# EAGLE board Genus_MainBoard_Lite-v.1.0 (EAGLE 9.4.2)
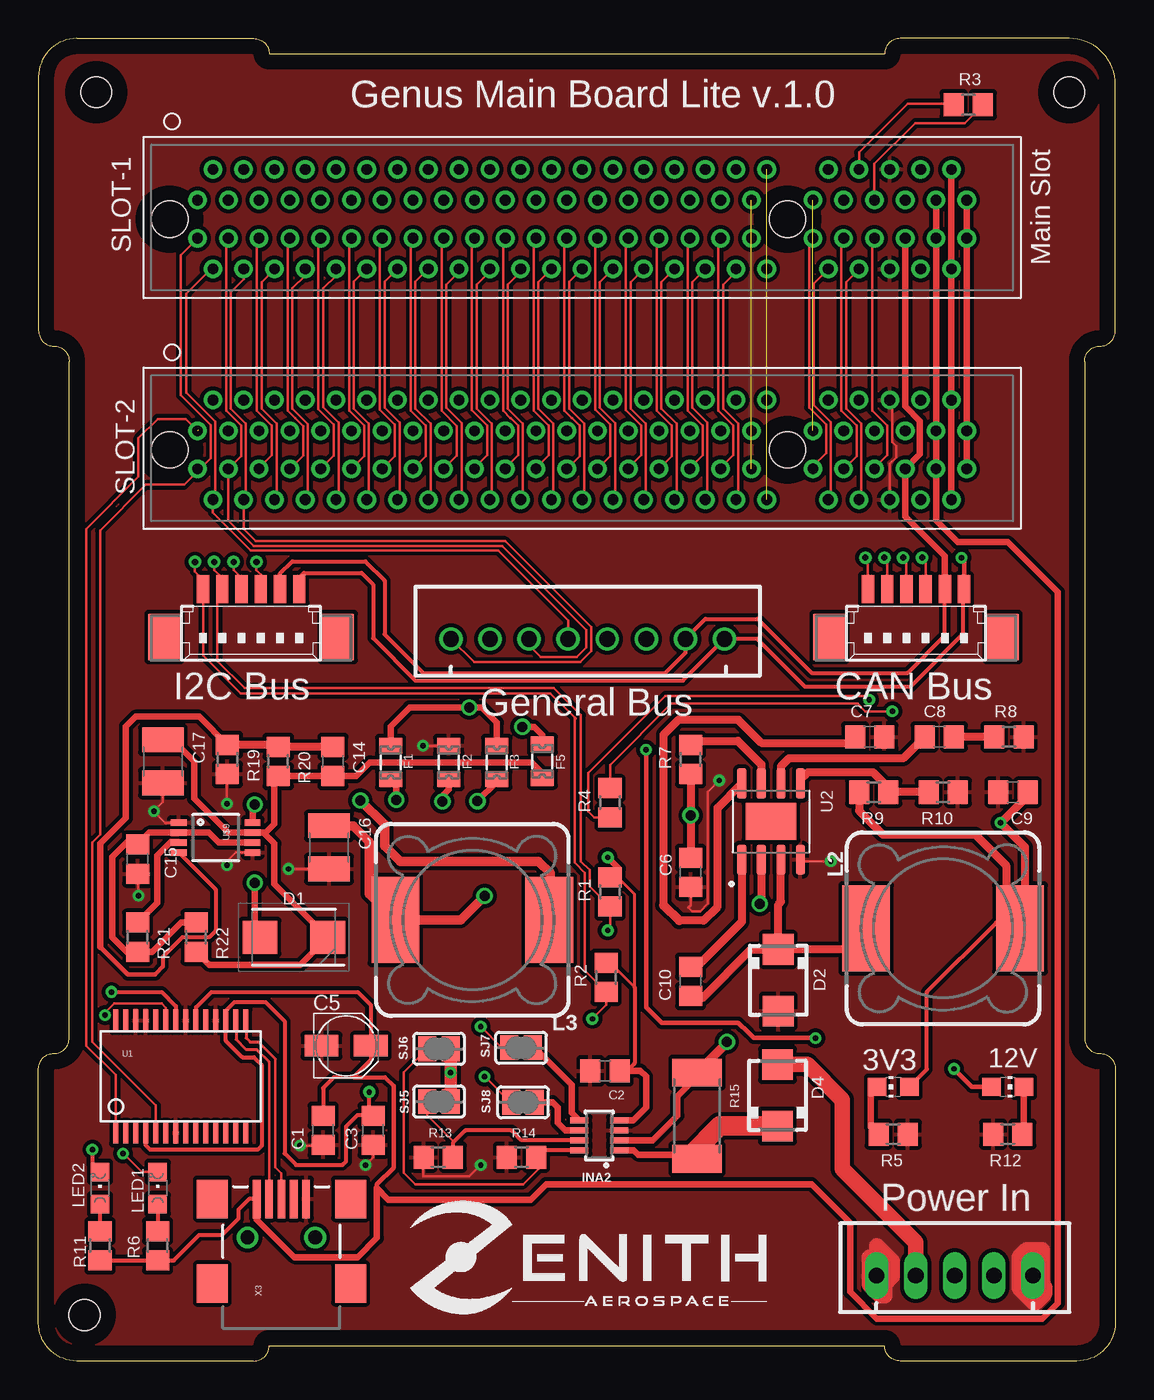
[diagram p0: board, top side]
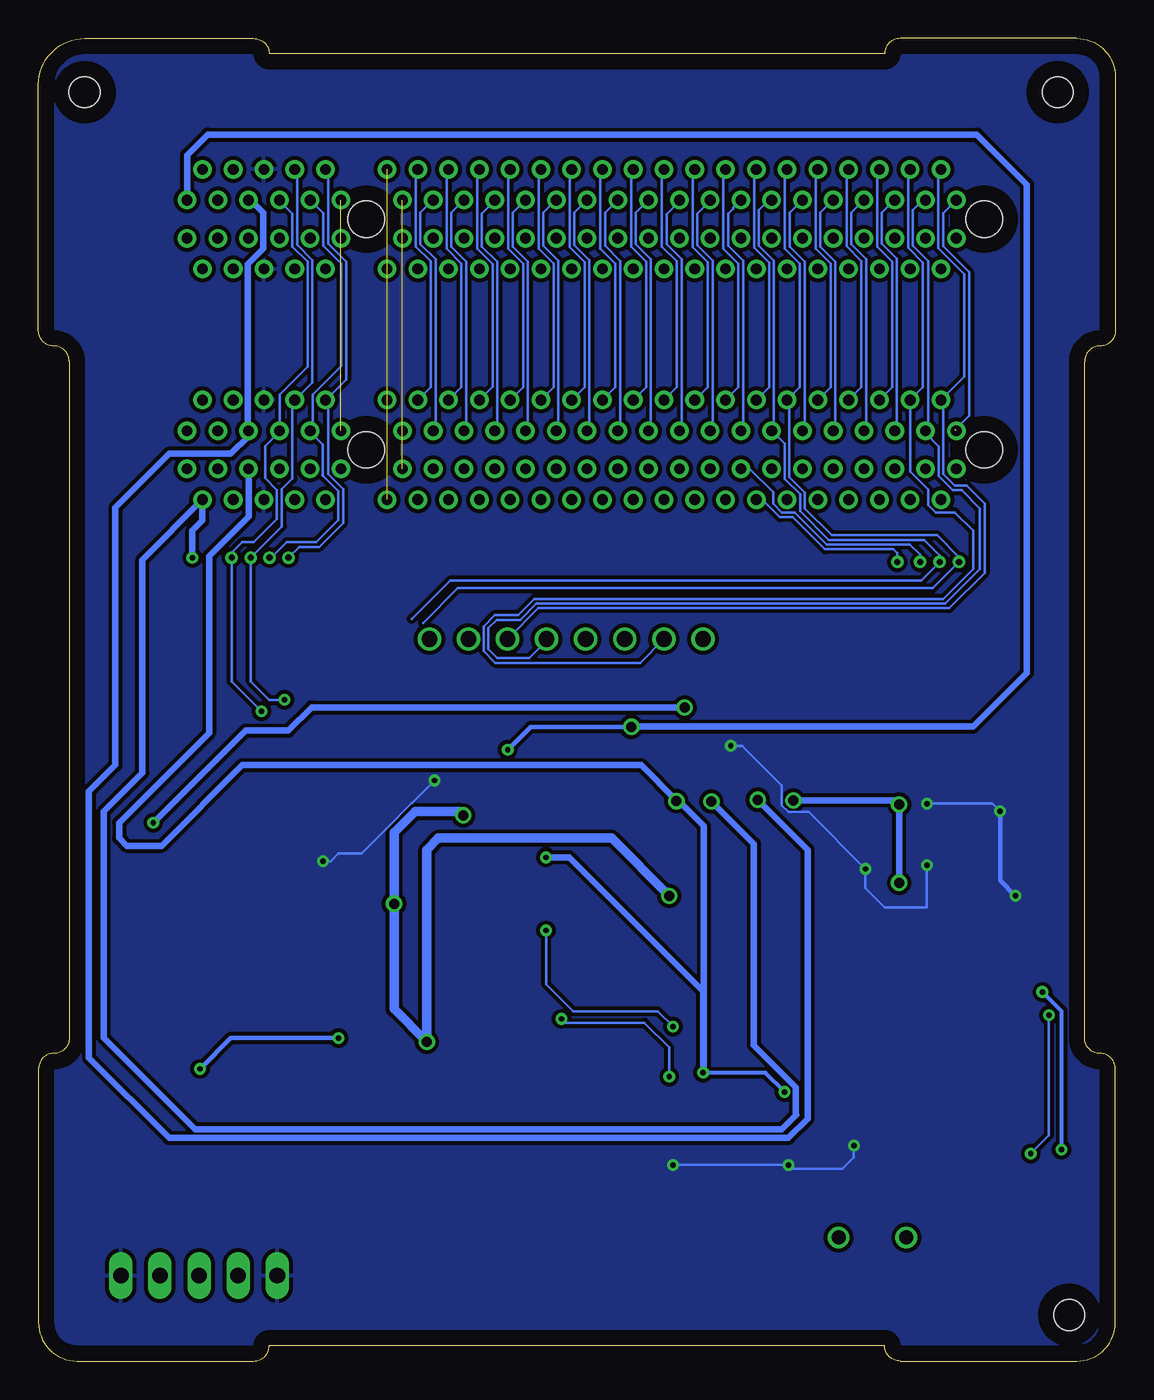
[diagram p1: board, bottom side, seen from below]

Size 70 x 86 mm. Coordinates in mm from the lower left corner, seen from the top.
Outline: 14,0 2.5,0 arc-90 0,2.5 0,19 arc-90 1,20 arc90 2,21 2,65 arc90 1,66 arc-90 0,67 0,83.5 arc-90 2.5,86 14,86 arc-90 15,85 55,85 arc-90 56,86 67,86 arc-90 70,83 70,67 arc-90 69,66 arc90 68,65 68,21 arc90 69,20 arc-90 70,19 70,2.5 arc-90 67.5,0 56,0 arc-90 55,1 15,1 arc-90 14,0
Copper layers (1*16): Top 0.035mm / dielectric 1.5mm / Bottom 0.035mm
Design rules "default": minimum track width 6mil, minimum drill 0.35mm, track to track 6mil, track to pad 6mil, pad to pad 6mil, via to via 6mil, smd to smd 6mil, copper to edge 40mil, drill to drill 6mil, minimum pad ring 10mil, minimum via ring 8mil, stop-mask expansion 4mil, vias tented up to drill 0mil, thermal gap 10mil
Net classes: 1 power: width 0.254 mm
Holes 2 mm at 3.75,82.5 67,82.5 3,3

## Footprints (pad centres in the part's own frame; a part is rotated, then mirrored left to right if it is on the bottom)
CHIP-LED0805 = smd 1.2 x 1.2: A 0,-1.05; C 0,1.05
C0805 = smd 1.3 x 1.5: 1 -0.95,0; 2 0.95,0
PANASONIC_B = smd 2.2 x 1.4: + 1.6,0; - -1.6,0
C1210 = smd 1.6 x 2.7: 1 -1.4,0; 2 1.4,0
DIOM5436X247N = smd 2.25 x 2.15: 1 -2.2,0; 2 2.2,0
SMA = smd 2 x 2: A 2,0; C -2,0
0805L = smd 1 x 1.5: 1 -1.1,0; 2 1.1,0
SOT23-8 = smd 0.4 x 1.2: 1 -0.975,-1.3; 2 -0.325,-1.3; 3 0.325,-1.3; 4 0.975,-1.3; 5 0.975,1.3; 6 0.325,1.3; 7 -0.325,1.3; 8 -0.975,1.3
SRR1280 = smd 5.6 x 3.1: 1 0.635,5; 2 0.635,-5
CHIPLED_0805 = smd 1.2 x 1.2: A 0,-1.05; C 0,1.05
R0805 = smd 1.3 x 1.5: 1 -0.95,0; 2 0.95,0
R2512 = smd 1.8 x 3.2: 1 -2.8,0; 2 2.8,0
SOLDERJUMPER_REFLOW_NOPASTE = smd 1.168 x 1.6: 1 -0.762,0; 2 0.762,0
PCIE-098-02-X-D-TH = drill 0.7 pad 1.1: A1 25,-1.24; A2 24,-3.24; A3 23,-1.24; A4 22,-3.24; A5 21,-1.24; A6 20,-3.24; A7 19,-1.24; A8 18,-3.24; A9 17,-1.24; A10 16,-3.24; A11 15,-1.24; A12 12,-3.24; A13 11,-1.24; A14 10,-3.24; A15 9,-1.24; A16 8,-3.24; A17 7,-1.24; A18 6,-3.24; A19 5,-1.24; A20 4,-3.24; A21 3,-1.24; A22 2,-3.24; A23 1,-1.24; A24 0,-3.24; A25 -1,-1.24; A26 -2,-3.24; A27 -3,-1.24; A28 -4,-3.24; A29 -5,-1.24; A30 -6,-3.24; A31 -7,-1.24; A32 -8,-3.24; A33 -9,-1.24; A34 -10,-3.24; A35 -11,-1.24; A36 -12,-3.24; A37 -13,-1.24; A38 -14,-3.24; A39 -15,-1.24; A40 -16,-3.24; A41 -17,-1.24; A42 -18,-3.24; A43 -19,-1.24; A44 -20,-3.24; A45 -21,-1.24; A46 -22,-3.24; A47 -23,-1.24; A48 -24,-3.24; A49 -25,-1.24; B1 25,1.24; B2 24,3.24; B3 23,1.24; B4 22,3.24; B5 21,1.24; B6 20,3.24; B7 19,1.24; B8 18,3.24; B9 17,1.24; B10 16,3.24; B11 15,1.24; B12 12,3.24; B13 11,1.24; B14 10,3.24; B15 9,1.24; B16 8,3.24; B17 7,1.24; B18 6,3.24; B19 5,1.24; B20 4,3.24; B21 3,1.24; B22 2,3.24; B23 1,1.24; B24 0,3.24; B25 -1,1.24; B26 -2,3.24; B27 -3,1.24; B28 -4,3.24; B29 -5,1.24; B30 -6,3.24; B31 -7,1.24; B32 -8,3.24; B33 -9,1.24; B34 -10,3.24; B35 -11,1.24; B36 -12,3.24; B37 -13,1.24; B38 -14,3.24; B39 -15,1.24; B40 -16,3.24; B41 -17,1.24; B42 -18,3.24; B43 -19,1.24; B44 -20,3.24; B45 -21,1.24; B46 -22,3.24; B47 -23,1.24; B48 -24,3.24; B49 -25,1.24 | hole 2.35: 13.35,0; -26.81,0
SSOP28DB = smd 0.348 x 1.397: 1 -4.225,-3.656; 2 -3.575,-3.656; 3 -2.925,-3.656; 4 -2.275,-3.656; 5 -1.625,-3.656; 6 -0.975,-3.656; 7 -0.325,-3.656; 8 0.325,-3.656; 9 0.975,-3.656; 10 1.625,-3.656; 11 2.275,-3.656; 12 2.925,-3.656; 13 3.575,-3.656; 14 4.225,-3.656; 15 4.225,3.656; 16 3.575,3.656; 17 2.925,3.656; 18 2.275,3.656; 19 1.625,3.656; 20 0.975,3.656; 21 0.325,3.656; 22 -0.325,3.656; 23 -0.975,3.656; 24 -1.625,3.656; 25 -2.275,3.656; 26 -2.925,3.656; 27 -3.575,3.656; 28 -4.225,3.656
SOIC127P600X170-9N = smd 1.97 x 0.6: 1 -2.475,1.905; 2 -2.475,0.635; 3 -2.475,-0.635; 4 -2.475,-1.905; 5 2.475,-1.905; 6 2.475,-0.635; 7 2.475,0.635; 8 2.475,1.905 | smd 2.41 x 3.3: 9 0,0
MSOP-8 = smd 0.41 x 1.02: 1 -0.975,-2.4; 2 -0.325,-2.4; 3 0.325,-2.4; 4 0.975,-2.4; 5 0.975,2.4; 6 0.325,2.4; 7 -0.325,2.4; 8 -0.975,2.4
53398-06 = smd 0.8 x 1.8: 1 3.125,-2.5; 2 1.875,-2.5; 3 0.625,-2.5; 4 -0.625,-2.5; 5 -1.875,-2.5; 6 -3.125,-2.5 | smd 2.1 x 3: S1 5.625,0.625; S2 -5.625,0.625
JST-XH-08-PACKAGE-ROUND-PAD = drill 1.016: 1 -8.89,0; 2 -6.35,0; 3 -3.81,0; 4 -1.27,0; 5 1.27,0; 6 3.81,0; 7 6.35,0; 8 8.89,0
USB-MINIB-NOSTOP = smd 2.5 x 0.5: D+ 2.5,0; D- 2.5,0.8; GND 2.5,-1.6; ID 2.5,-0.8; VBUS 2.5,1.6 | smd 2.5 x 2: G1 -3,-4.5; G2 -3,4.5; G3 2.5,4.5; G4 2.5,-4.5 | drill 0.9 pad 0.8: H1 0,2.2 | drill 0.9 pad 0.787: H2 0,-2.2
JST-XH-05-PACKAGE-LONG-PAD = drill 1.016 long: 1 -5.08,0; 2 -2.54,0; 3 0,0; 4 2.54,0; 5 5.08,0

## Placement (x,y rotation side)
3V3  [CHIP-LED0805]  55.56,17.83 90 top
12V  [CHIP-LED0805]  63,17.83 270 top
C1  0.1uF  [C0805]  18.5,15 270 top
C2  [C0805]  36.83,18.87 180 top
C3  0.1uF  [C0805]  21.75,15 270 top
C5  10uF  [PANASONIC_B]  20,20.5 0 top
C6  10uF  [C0805]  42.39,31.78 270 top
C7  0.1uF  [C0805]  54.03,40.59 0 top
C8  3.9nF  [C0805]  58.55,40.59 0 top
C9  22uF  [C0805]  63.34,36.99 180 top
C10  10nF  [C0805]  42.39,24.69 90 top
C14  39pF  [C0805]  19.14,38.99 270 top
C15  100nF  [C0805]  6.44,32.64 90 top
C16  22uF  [C1210]  18.89,33.4 270 top
C17  68uF  [C1210]  8.09,38.99 270 top
D1  MBRS140T3G  [DIOM5436X247N]  16.6,27.56 180 top
D2  B130-13-F  [SMA]  48.09,24.76 270 top
D4  S1M  [SMA]  48.04,17.28 90 top
F1  0805L075  [0805L]  22.89,38.92 90 top
F2  0805L075  [0805L]  26.67,38.92 90 top
F3  0805L075  [0805L]  29.79,38.92 90 top
F5  0805L075  [0805L]  32.75,39 270 top
INA2  INA219BIDCNT  [SOT23-8]  36.45,14.68 90 top
L2  10uH  [SRR1280]  58.8,27.5 90 top
L3  6.8uH  [SRR1280]  28.2,28.05 90 top
LED1  Red  [CHIPLED_0805]  7.75,11.25 0 top
LED2  Green  [CHIPLED_0805]  4,11.25 0 top
R1  4,7k  [R0805]  37.15,30.5 90 top
R2  4,7k  [R0805]  36.9,24.95 90 top
R3  120  [R0805]  60.44,81.69 0 top
R4  120  [R0805]  37.15,36.31 90 top
R5  220  [R0805]  55.56,14.74 180 top
R6  1K  [R0805]  7.75,7.5 270 top
R7  100K  [R0805]  42.39,39.12 270 top
R8  6.8K  [R0805]  63.08,40.59 180 top
R9  26.1K  [R0805]  54.3,36.99 180 top
R10  10K  [R0805]  58.8,36.99 180 top
R11  1K  [R0805]  4,7.5 270 top
R12  500  [R0805]  63,14.74 0 top
R13  10K  [R0805]  25.98,13.26 0 top
R14  10K  [R0805]  31.4,13.26 0 top
R15  0.1  [R2512]  42.8,15.95 270 top
R19  17k3  [R0805]  12.28,39.12 270 top
R20  150K  [R0805]  15.58,38.99 270 top
R21  200K  [R0805]  6.44,27.56 270 top
R22  200K  [R0805]  10.25,27.56 270 top
SJ5  [SOLDERJUMPER_REFLOW_NOPASTE]  26.03,16.87 180 top
SJ6  [SOLDERJUMPER_REFLOW_NOPASTE]  26.03,20.3 180 top
SJ7  [SOLDERJUMPER_REFLOW_NOPASTE]  31.37,20.37 0 top
SJ8  [SOLDERJUMPER_REFLOW_NOPASTE]  31.5,16.82 0 top
SLOT-1  PCIE-098-02-X-D-TH  [PCIE-098-02-X-D-TH]  35.34,74.25 0 top
SLOT-2  PCIE-098-02-X-D-TH  [PCIE-098-02-X-D-TH]  35.34,59.25 0 top
U1  FT232RLSSOP  [SSOP28DB]  9.25,18.5 0 top
U2  MP2307DN-LF-Z  [SOIC127P600X170-9N]  47.62,35.08 90 top
U$9  LM2621SMD  [MSOP-8]  11.52,34.04 270 top
X1  53398-06  [53398-06]  13.82,47.7 180 top
X2  JST-XH-08-PIN-ROUND-PAD  [JST-XH-08-PACKAGE-ROUND-PAD]  35.7,46.95 0 top
X3  USB-SMD-NS  [USB-MINIB-NOSTOP]  15.79,8.04 90 top
X5  53398-06  [53398-06]  57.04,47.7 180 top
X15  JST-XH-05-PIN-LONG-PAD  [JST-XH-05-PACKAGE-LONG-PAD]  59.56,5.56 0 top

## Library data of the parts
3V3 12V LED1 LED2 = led
C1-C3 C5-C10 C14-C17 = rcl; SPICEPREFIX: C
D1 = MBRS140T3G; ALLIED_NUMBER: 70099505; ALLIED_PRICE/STOCK: http://www.alliedelec.com/on-semiconductor-mbrs140t3g/70099505/; ARROW_PART_NUMBER: MBRS140T3G; ARROW_PRICE/STOCK: https://www.arrow.com/en/products/mbrs140t3g/on-semiconductor; HEIGHT: 2.47mm; MANUFACTURER_NAME: ON Semiconductor; MANUFACTURER_PART_NUMBER: MBRS140T3G; RS_PART_NUMBER: 5452074P; RS_PRICE/STOCK: http://uk.rs-online.com/web/p/products/5452074P
D2 = B130-13-F; AVAILABILITY: Unavailable; DESCRIPTION: Diode Schottky 30V 1A Surface Mount SMA; MF: Multicomp; MP: B130-13-F; PACKAGE: DO-214 Multicomp; PRICE: None
D4 = diode
F1-F3 F5 = polyfuse-smd_10; MF: Littelfuse; MPN: 0805L075; OC_FARNELL: 1832105RL; OC_NEWARK: 18M4777
INA2 SJ5-SJ8 = microbuilder
L2 L3 = inductor-bourns
R1-R15 R19-R22 = rcl; SPICEPREFIX: R
SLOT-1 SLOT-2 = Z_BUS; AVAILABILITY: Unavailable; DESCRIPTION: 98 Position Female Connector PCI Express™ Gold 0.039 _1.00mm_ Black; MF: Samtec; MP: PCIE-098-02-F-D-TH; PACKAGE: None; PRICE: None
U1 X3 = SparkFun
U2 = MP2307DN-LF-Z; AVAILABILITY: Unavailable; DESCRIPTION: Buck Switching Regulator IC Positive Adjustable 0.925V 1 Output 3A 8-SOIC _0.154, 3.90mm Width_ Exposed Pad; MF: Monolithic Power; MP: MP2307DN-LF-Z; PACKAGE: SOIC-8 Monolithic Power; PRICE: None
U$9 = SparkFun-PowerIC
X1 X5 = con-zenith; MF: MOLEX; OC_FARNELL: 1125368; OC_NEWARK: unknown
X2 X15 = JST-XH-Zenith

## Nets
3V3_A: C2.1 C3.1 F3.1 INA2.4 R1.2 R2.2 SJ5.1 SJ6.1 SLOT-1.A5 SLOT-2.A5 U1.4 U1.17 X1.5 X2.7 X5.5
3V3_B: F1.1 SLOT-1.B5 SLOT-2.B5
5V: C1.1 C5.+ R6.2 R11.2 SLOT-1.A3 SLOT-1.B3 SLOT-2.A3 SLOT-2.B3 U1.20 X3.VBUS
12V: 12V.A F5.1 SLOT-1.A1 SLOT-1.B1 SLOT-2.A1 SLOT-2.B1
ADC_1: SLOT-1.A41 SLOT-2.A41
BAT1: X15.4
BAT2: X15.3
BAT_IN: D4.C INA2.1 R15.2
BAT_INA_OUT: C6.1 C16.1 INA2.2 L3.1 R7.2 R15.1 U2.2
BOOT: SLOT-1.A13 SLOT-2.A13
CAN_HIGH: R3.2 R4.2 SLOT-1.B7 SLOT-2.B7 X5.4
CAN_LOW: R3.1 R4.1 SLOT-1.B8 SLOT-2.B8 X5.3
CTS: U1.11
DAC_1: SLOT-1.A39 SLOT-2.A39
DTR: U1.2
ECM_1: SLOT-1.B49 SLOT-2.B49 U1.1
ECM_2: SLOT-1.A49 SLOT-2.A49 U1.5
EP: U2.9
EXT_1: SLOT-1.A37 SLOT-2.A37
EXT_2: SLOT-1.A38 SLOT-2.A38
GB1_1: SLOT-1.A46 SLOT-2.A46 X2.1
GB1_2: SLOT-1.B46 SLOT-2.B46 X2.2
GB1_3: SLOT-1.A47 SLOT-2.A47 X2.3
GB1_4: SLOT-1.A48 SLOT-2.A48 X2.4
GB1_5: SLOT-1.B47 SLOT-2.B47 X2.5
GB1_6: SLOT-1.B48 SLOT-2.B48 X2.6
GB2_1: SLOT-1.A42 SLOT-2.A42
GB2_2: SLOT-1.B43 SLOT-2.B43
GB2_3: SLOT-1.B44 SLOT-2.B44
GB2_4: SLOT-1.A44 SLOT-2.A44
GB2_5: SLOT-1.A45 SLOT-2.A45
GB2_6: SLOT-1.B45 SLOT-2.B45
GEP_1: SLOT-1.A7 SLOT-2.A7
GEP_2: SLOT-1.A8 SLOT-2.A8
GEP_3: SLOT-1.A9 SLOT-2.A9
GEP_4: SLOT-1.A10 SLOT-2.A10
GEP_5: SLOT-1.A11 SLOT-2.A11
GND: C1.2 C2.2 C3.2 C5.- C6.2 C7.2 C9.2 C15.1 C16.2 C17.2 D2.A F2.2 INA2.3 R5.1 R8.1 R10.1 R12.1 R13.1 R14.1 R19.2 SLOT-1.A6 SLOT-1.B6 SLOT-2.A6 SLOT-2.B6 U1.7 U1.18 U1.21 U1.25 U1.26 U2.4 U$9.1 U$9.5 X3.GND X15.1 X15.5
GND_1: F2.1 SLOT-1.A2 SLOT-1.B2 SLOT-2.A2 SLOT-2.B2 X1.6 X2.8 X5.6
GP_1: SLOT-1.B22 SLOT-2.B22
GP_2: SLOT-1.B23 SLOT-2.B23
GP_3: SLOT-1.B24 SLOT-2.B24
GP_4: SLOT-1.B25 SLOT-2.B25
GP_5: SLOT-1.B28 SLOT-2.B28
GP_6: SLOT-1.B29 SLOT-2.B29
GP_7: SLOT-1.B30 SLOT-2.B30
GP_8: SLOT-1.B31 SLOT-2.B31
GP_9: SLOT-1.B32 SLOT-2.B32
GP_10: SLOT-1.A28 SLOT-2.A28
GP_11: SLOT-1.A29 SLOT-2.A29
GP_12: SLOT-1.A30 SLOT-2.A30
GP_13: SLOT-1.A31 SLOT-2.A31
GP_14: SLOT-1.A32 SLOT-2.A32
GP_15: SLOT-1.A33 SLOT-2.A33
GP_16: SLOT-1.A34 SLOT-2.A34
GP_17: SLOT-1.A35 SLOT-2.A35 X1.3
GP_18: SLOT-1.A36 SLOT-2.A36 X1.4
INT_1: SLOT-1.B16 SLOT-2.B16
INT_1_(E): SLOT-1.A22 SLOT-2.A22
INT_2: SLOT-1.A16 SLOT-2.A16
INT_2_(E): SLOT-1.A23 SLOT-2.A23
INT_3: SLOT-1.B17 SLOT-2.B17
INT_3_(E): SLOT-1.A24 SLOT-2.A24
INT_4: SLOT-1.A17 SLOT-2.A17
INT_4_(E): SLOT-1.A25 SLOT-2.A25
INT_5: SLOT-1.B18 SLOT-2.B18
INT_5_(E): SLOT-1.A26 SLOT-2.A26
INT_6: SLOT-1.A18 SLOT-2.A18
INT_6_(E): SLOT-1.A27 SLOT-2.A27
INT_7: SLOT-1.B19 SLOT-2.B19
INT_8: SLOT-1.A19 SLOT-2.A19
INT_9: SLOT-1.B20 SLOT-2.B20
INT_10: SLOT-1.A20 SLOT-2.A20
INT_11: SLOT-1.B21 SLOT-2.B21
INT_12: SLOT-1.A21 SLOT-2.A21
INT_E_1: SLOT-1.B9 SLOT-2.B9 X5.2
INT_E_2: SLOT-1.B10 SLOT-2.B10 X5.1
INT_E_3: SLOT-1.B36 SLOT-2.B36
INT_E_4: SLOT-1.B35 SLOT-2.B35
INT_E_5: SLOT-1.B34 SLOT-2.B34
INT_E_6: SLOT-1.B33 SLOT-2.B33
MISO_1: SLOT-1.B15 SLOT-2.B15
MISO_2: SLOT-1.B42 SLOT-2.B42
MOSI_1: SLOT-1.A14 SLOT-2.A14
MOSI_2: SLOT-1.B41 SLOT-2.B41
N$1: LED1.A R6.1
N$2: LED2.A R11.1
N$3: 12V.C R12.2
N$4: INA2.8 R14.2 SJ6.2
N$6: D4.A X15.2
N$7: INA2.7 R13.2 SJ5.2
N$8: R7.1 U2.7
N$9: C8.2 R8.2
N$10: C7.1 U2.8
N$11: C8.1 U2.6
N$12: C10.1 D2.C L2.1 U2.3
N$13: R9.1 R10.2 U2.5
N$14: C10.2 U2.1
N$15: INA2.5 SJ7.2
N$16: INA2.6 SJ8.2
N$20: C14.1 R19.1 R20.1 U$9.4
N$21: D1.2 L3.2 U$9.8
N$22: C15.2 R21.2 R22.1 U$9.2 U$9.6
N$23: R21.1 U$9.3
N$37: 3V3.C R5.2
NRST: SLOT-1.A12 SLOT-2.A12
OUT: C14.2 C17.1 D1.1 F5.2 R20.2 R22.2 U$9.7
OUT_3V3: 3V3.A C9.1 F1.2 F3.2 L2.2 R9.2
PWM_1: SLOT-1.A40 SLOT-2.A40
PWM_2: SLOT-1.A43 SLOT-2.A43
RXLED: LED2.C U1.22
SCL_1: SLOT-1.B27 SLOT-2.B27
SCL_2: R1.1 SJ7.1 SLOT-1.B37 SLOT-2.B37 X1.2
SCLK_1: SLOT-1.B14 SLOT-2.B14
SCLK_2: SLOT-1.B40 SLOT-2.B40
SDA_1: SLOT-1.B26 SLOT-2.B26
SDA_2: R2.1 SJ8.1 SLOT-1.B38 SLOT-2.B38 X1.1
SS_1: SLOT-1.A15 SLOT-2.A15
SS_2: SLOT-1.B39 SLOT-2.B39
SWCLK: SLOT-1.B11 SLOT-2.B11
SWDIO: SLOT-1.B12 SLOT-2.B12
SWO: SLOT-1.B13 SLOT-2.B13
TXLED: LED1.C U1.23
USB_D+: U1.15 X3.D+
USB_D-: U1.16 X3.D-

## Tracks (layer width: path | path; a pad name or v marks a point on that pad's centre or on a via)
3V3_A  (via drill 0.35, 0.65)
  Top 0.203: R1.2 37.65,31.45 38.75,30.36 38.75,24.3 37.15,25.9 R2.2
  Top 0.254: X1.5 15.7,51.2 16.5,52 21.25,52 22.5,50.75 22.5,47.25 25,44.75 40.75,44.75 42.05,46.05 X2.7 43.35,48.25 46.75,48.25 50.25,44.75 56.5,44.75 58.91,47.16 X5.5 | U1.4 6.97,14.03 7.25,13.75 14.25,13.75 14.5,14 14.5,19.25 14,19.75 13.25,19.75 12.18,20.82 U1.17 12.16,22.17 12.16,22.76 12.74,23.34 14.75,23.34 16,22.09 16,13.5 16.75,12.75 19.75,12.75 20,13 20,15.25 20.75,16 21.7,16 C3.1 21.5,16.2 v21.5,17.5 | 38.75,24.3 38.75,19.37 38.25,18.87
  Top 0.406: SLOT-1.A5 56.34,62.08 57.3,61.12 57.3,58.97 SLOT-2.A5 56.34,54.91 58.91,52.34 X5.5 | INA2.4 38.66,15.65 39.5,16.5 39.5,18.5 39.13,18.87 38.25,18.87 C2.1 | F3.1 29.79,37.67 v28.53,36.41 | v37,32.75 37.72,32.03 R1.2
  Top 0.813: SJ6.1 v26.79,18.75 SJ5.1
  Bottom 0.254: v21.5,17.5 22.75,18.75 26.75,18.75 v26.79,18.75
  Bottom 0.406: 26.75,18.75 26.75,34.79 28.37,36.41 v28.53,36.41 28.53,36.45 30.83,38.75 56.75,38.75 62,33.5 64.25,33.5 64.75,34 64.75,35 58.91,40.84 58.91,52.34 56.34,54.91 SLOT-2.A5 | v26.79,18.75 26.79,24.04 35.5,32.75 v37,32.75
3V3_B  (via drill 0.65)
  Top 0.406: v23.25,36.5 23.25,37.5 23.14,37.61 23.1,37.61 F1.1
  Bottom 0.406: SLOT-1.B5 56.21,75.49 55.38,74.66 55.38,72.33 56.38,71.33 56.38,60.53 SLOT-2.B5 56.34,60.16 57.5,59 61.5,59 65,55.5 65,38.75 66.72,37.03 66.72,19.71 61.5,14.5 21.25,14.5 20,15.75 20,33.25 v23.25,36.5
5V
  Top 0.254: 20.45,18.45 19.2,18.45 18.5,17.75 C1.1 | 20.45,18.45 21.6,19.6 C5.+ 21.6,23.15 20.75,24 11.25,24 10.25,23 10.25,22.18 U1.20 | 20.45,18.45 22.52,18.45 23.08,17.89 | 14.19,9.2 X3.VBUS 13.69,10.54 13,9.85 13,9.25 11.95,8.2 10.45,8.2 8.8,6.55 R6.2 | 4.3,6.55 R11.2 R6.2 | R6.2 8.2,6.55 8.25,6.5 7.8,6.5 R6.2
  Top 0.305: 23.08,17.89 23.08,12.58 22,11.5 22,11.25
  Top 0.406: 14.19,9.2 16.64,6.75 20.75,6.75 22,8 22,11.25 22.75,10.5 32,10.5 33,11.5 50.25,11.5 52.75,9 52.75,4.5 54.5,2.75 65.25,2.75 66.26,3.76 66.26,49.99 63,53.25 59.75,53.25 58.34,54.66 SLOT-2.A3 SLOT-2.B3 SLOT-1.A3 SLOT-1.B3
12V  (via drill 0.35, 0.65)
  Top 0.305: 12V.A 60.67,17.83 v59.5,19 | v50.5,21 46.5,21 46.12,21.38 45.5,22 42.25,22 40.5,22 39.5,23 v39.5,39.75
  Top 0.406: SLOT-1.B1 SLOT-1.A1 SLOT-2.B1 SLOT-2.A1 | F5.1 32.75,40.7 32.21,41.24 v31.46,41.24
  Bottom 0.305: v59.5,19 57.5,21 v50.5,21 | v39.5,39.75 38.01,41.24 v31.46,41.24
  Bottom 0.406: SLOT-1.B1 60.34,78.41 59,79.75 9,79.75 5.75,76.5 5.75,44.75 9.25,41.25 v31.45,41.25 v31.46,41.24
ADC_1
  Top 0.152: SLOT-1.A41 18.19,72.86 18.19,61.91 19.2,60.9 19.2,58.87 SLOT-2.A41
BAT_IN
  Top 0.406: INA2.1 38.7,13.71 38.99,13.41 42.54,13.41 R15.2
  Top 1.27: D4.C 44.29,15.28 42.42,13.41 42.54,13.41
BAT_INA_OUT  (via drill 0.65)
  Top 0.406: INA2.2 39.94,14.36 41.53,15.95 41.53,17.22 42.8,18.49 R15.1 | 21.5,30.39 21.5,32.75
  Top 0.508: R7.2 v42.39,35.49 C6.1 | U2.2 46.98,29.84 v46.89,29.74
  Top 0.61: L3.1 | L3.1 21.5,30.39 21.5,33.75 20.45,34.8 C16.1 | R15.1 44.75,20.7 v44.75,20.75 | v29,30.25 27.44,28.69 L3.1
  Bottom 0.61: v42.39,35.49 42.65,35.75 45.5,35.75 46.89,34.36 v46.89,29.74 46.89,22.89 v44.75,20.75 44.75,33.25 44,34 32.75,34 v29,30.25
BOOT  (1 unrouted)
CAN_HIGH  (via drill 0.35, 0.4)
  Top 0.152: X5.4 57.66,52.09 57.51,52.24 v57.44,52.24 | R3.2 60.2,80.5 57,80.5 54.34,77.84 SLOT-1.B7 | R4.2 37.15,38.76 41.14,42.75 53.25,42.75 53.75,42.25 v55.5,42.25
  Bottom 0.152: SLOT-1.B7 54.34,75.44 53.49,74.59 53.49,72.46 52.51,71.48 52.51,64.65 54.32,62.84 54.32,60.51 SLOT-2.B7 54.34,60.44 55.27,59.51 55.27,57.41 54.5,56.64 54.5,54.75 56,53.25 56.75,53.25 57.44,52.56 v57.44,52.24 57.44,44.19 v55.5,42.25
CAN_LOW  (via drill 0.35, 0.4)
  Top 0.152: X5.3 56.41,52.02 v56.2,52.23 v56.2,52.24 | R3.1 59.43,81.75 56.5,81.75 53.34,78.59 SLOT-1.B8 | R4.1 36.14,35.36 35.75,35.75 35.75,38.25 40.75,43.25 53.75,43.25 v54,43
  Bottom 0.152: SLOT-1.B8 53.19,77.34 53.19,72.59 52.2,71.6 52.2,63.63 SLOT-2.B8 53.5,62.33 53.5,57.38 54.17,56.7 54.17,54.27 v56.2,52.24 56.2,44.2 55,43 v54,43
DAC_1
  Top 0.152: SLOT-1.A39 20.2,72.87 20.2,61.81 21.17,60.84 21.17,58.84 SLOT-2.A39
ECM_1  (1 unrouted)
  Top 0.152: U1.1 5.03,18.59 3.11,20.51 3.11,54.11 6.5,57.5 6.5,60 7.75,61.25 9.58,61.25 SLOT-2.B49
  Top 0.203: U1.1 5,14.87
  Bottom 0.152: SLOT-1.B49 11.2,74.63 11.2,72.5 9.5,70.8 9.5,61.49 10.42,60.57
ECM_2
  Top 0.152: SLOT-1.A49 9.25,71.92 9.25,62.8 11.2,60.85 11.2,58.71 10.49,58.01 | U1.5 7.62,16.62 3.48,20.77 3.48,33.72 4,34.24 4,54 6.98,56.98 9.47,56.98 10.49,58.01 | SLOT-2.A49 10.49,58.01
EXT_1
  Top 0.152: SLOT-1.A37 22.19,72.86 22.19,61.87 23.17,60.88 23.17,58.84 SLOT-2.A37
EXT_2
  Top 0.152: SLOT-1.A38 20.5,70.17 20.5,62.93 20.51,62.94 20.51,61.93 21.48,60.96 21.48,56.15 SLOT-2.A38
GB1_1
  Top 0.152: SLOT-1.A46 13.34,70.34 12.51,69.5 12.51,61.93 13.48,60.96 13.48,56.15 SLOT-2.A46 13.34,54.09 14.12,53.31 30.34,53.31 35.92,47.73 35.92,46.17 35.2,45.45 28.31,45.45 X2.1
GB1_2
  Bottom 0.152: SLOT-1.B46 13.48,77.35 13.48,72.39 12.51,71.42 12.51,63.32 SLOT-2.B46 13.34,57.83 12.17,56.66 12.17,55.66 11.69,55.18 10.43,55.18 9.25,54 9.25,51.5 11.19,49.56 37.76,49.56 38.82,48.51 40.33,48.51 41.05,47.78 41.05,46.16 40.3,45.41 30.89,45.41 X2.2
GB1_3
  Top 0.152: SLOT-1.A47 12.2,72.87 12.2,61.81 13.17,60.84 13.17,58.84 SLOT-2.A47 12.34,54.66 14.01,52.99 30.16,52.99 35.61,47.54 35.61,46.41 34.98,45.78 32.65,45.78 31.89,46.54 X2.3
GB1_4
  Top 0.152: SLOT-1.A48 11.19,71.01 9.6,69.42 9.6,62.98 11.51,61.08 11.51,58.59 11.5,58.58 11.5,56.17 SLOT-2.A48 11.34,55.16 13.81,52.69 29.88,52.69 34.43,48.14 X2.4
GB1_5
  Bottom 0.152: SLOT-1.B47 12.51,75.49 13.17,74.83 13.17,72.52 12.17,71.52 12.17,60.66 SLOT-2.B47 12.34,60.34 11.48,59.48 11.48,57.54 10.56,56.62 10,56.62 8.8,55.43 8.8,51.5 11.05,49.26 37.64,49.26 38.69,48.2 40.2,48.2 40.75,47.65 40.75,46.29 40.17,45.71 38.1,45.71 36.97,46.84 X2.5
GB1_6
  Bottom 0.152: SLOT-1.B48 11.51,77.33 11.51,72.37 9.82,70.68 9.82,64.01 SLOT-2.B48 11.17,62.32 11.17,57.66 10.44,56.93 9.68,56.93 8.5,55.75 8.5,51.25 10.8,48.95 37.51,48.95 X2.6
GB2_1
  Top 0.152: SLOT-1.A42 17.34,70.59 16.51,69.76 16.51,61.93 17.5,60.93 17.5,56.17 SLOT-2.A42
GB2_2
  Bottom 0.152: SLOT-1.B43 17.17,74.66 17.17,72.62 16.2,71.65 16.2,60.63 SLOT-2.B43
GB2_3
  Bottom 0.152: SLOT-1.B44 15.48,77.35 15.48,72.47 14.51,71.5 14.51,63.33 SLOT-2.B44
GB2_4
  Top 0.152: SLOT-1.A44 14.5,70.17 14.5,61.94 15.48,60.96 15.48,56.15 SLOT-2.A44
GB2_5
  Top 0.152: SLOT-1.A45 14.19,72.86 14.19,61.82 15.17,60.84 15.17,58.9 14.59,58.31 14.59,58.26 SLOT-2.A45
GB2_6
  Bottom 0.152: SLOT-1.B45 15.17,74.66 15.17,72.67 14.2,71.69 14.2,60.63 SLOT-2.B45
GEP_1
  Top 0.152: SLOT-1.A7 54.19,72.86 54.19,61.82 55.17,60.84 55.17,58.9 54.34,58.06 SLOT-2.A7
GEP_2
  Top 0.152: SLOT-1.A8 52.5,70.17 52.5,61.94 53.48,60.96 53.48,56.15 SLOT-2.A8
GEP_3
  Top 0.152: SLOT-1.A9 52.19,72.86 52.19,61.82 53.17,60.84 53.17,58.84 SLOT-2.A9
GEP_4
  Top 0.152: SLOT-1.A10 50.4,70.06 50.4,62.15 51.51,61.04 51.51,56.17 SLOT-2.A10
GEP_5
  Top 0.152: SLOT-1.A11 50.09,72.76 50.09,62.01 51.2,60.9 51.2,59.05 50.34,58.19 SLOT-2.A11
GND  (via drill 0.35)
  Top 0.152: SLOT-2.B6 55.5,62.33 55.5,59.75 55.75,59.5 55.75,58.75 55.34,58.34 SLOT-2.A6 | C15.1 6.5,31.63 v6.5,30.25 | U$9.1 9.11,35 8.25,35 v7.5,35.75 8.09,36.34 C17.2 | C1.2 18.45,14 v17,14 | C3.2 21.75,13.25 v21.25,12.75 | v28.75,12.75 28,12 25,12 25,13.22 R13.1 | v16.25,32 C16.2 | v12.25,32.25 12.25,32.5 12.81,33.06 U$9.5 | v12.25,36.25 12.25,38.13 R19.2 | C6.2 42.39,29.64 42.25,29.5 42.5,29.25 43,29.25 43.5,29.75 43.5,37 v44.25,37.75 | v51.5,32.5 49.63,32.5 U2.4 | F2.2 26.65,40 v25,40
  Top 1.016: 65.25,6.17 X15.5 65.25,4.95 | 65.25,6.17 65.25,7.25 64.25,7.25 63.75,6.75 63.75,4.75 64.75,3.75 65.39,4.39 65.39,4.81 65.25,4.95 | 65.25,6.17 65.25,4.95 | X15.1 54.48,7.48 54.5,7.5 55.5,6.5 55.5,5.5 55,5 55,4.25 54.75,4.25 54,5 54,6.75 54.48,6.27 X15.1
  Bottom 0.152: v17,14 17,13.25 17.75,12.5 21.25,12.5 v21.25,12.75 v28.75,12.75 | v12.25,32.25 12.25,29.5 15,29.5 16.25,30.75 v16.25,32 19.94,35.69 21.24,35.69 21.69,36.14 21.69,37.44 24.25,40 v25,40 | v7.5,35.75 8,36.25 v12.25,36.25 | v44.25,37.75 45.72,36.28 47.42,34.58 49,33 50.5,33 51,32.5 v51.5,32.5
  Bottom 0.305: v6.5,30.25 7.5,31.25 v7.5,35.75
  pour Top (isolate 0.254): 15,85 arc90 14,86 2.5,86 arc90 0,83.5 0,83.25 0,67 arc90 1,66 arc-90 2,65 2,64.5 2,21 arc-90 1,20 0.75,20 arc90 0,19.25 0,18.75 0,2 arc90 2,0 2.75,0 13.75,0 14.25,0 arc90 15,0.75 arc-90 15.25,1 55,1 arc90 56,0 56.75,0 68,0 arc90 70,2 70,3 70,18.75 70,19 arc90 69,20 68.75,20 arc-90 68,20.75 68,21.5 68,64.5 68,65 arc-90 69,66 arc90 70,67 70,68.25 70,83.25 arc90 67.25,86 65.75,86 56,86 arc90 55,85
  pour Bottom (isolate 0.254): 15,85 arc90 14,86 13.5,86 2,86 arc90 0,84 0,82.25 0,66.75 arc90 0.75,66 1.25,66 arc-90 2,65.25 2,65 2,21.75 2,21 arc-90 1,20 0.75,20 arc90 0,19.25 0,18.75 0,2 arc90 2,0 13,0 14.25,0 arc90 15,0.75 15,1 55,1 arc90 56,0 62,0 68,0 arc90 70,2 70,3 70,18.75 70,19 arc90 69,20 68.75,20 arc-90 68,20.75 68,21.75 68,65 arc-90 69.25,66.25 69.75,66.25 arc90 70,66.5 70,68.5 70,82 70,82.75 70,83.5 arc90 67.5,86 56.5,86 56,86 arc90 55,85
GND_1  (via drill 0.35, 0.65)
  Top 0.254: X1.6 16.95,50.95 17.25,51.25 21,51.25 21.75,50.5 21.75,47 24.5,44.25 41.89,44.25 X2.8 46.73,46.95 49.83,43.84 56.67,43.84 60.09,47.27 60.09,50.13 X5.6
  Top 0.305: X5.6 60.16,52.08 v60,52.24
  Top 0.406: SLOT-1.B2 SLOT-1.A2 SLOT-2.B2 SLOT-2.A2 | F2.1 26.67,37.17 26.26,36.76 v26.26,36.39
  Bottom 0.305: 60,55.35 SLOT-2.A2
  Bottom 0.406: v26.26,36.39 23.5,33.63 23.5,20.54 20.77,17.8 20.77,16.02 20.75,16 21.69,15.06 59.81,15.06 65.75,21 65.75,35.75 63.25,38.25 63.25,52.1 SLOT-2.A2 59.34,54.65 60,53.99 v60,52.24
GP_1
  Bottom 0.152: SLOT-1.B22 37.48,77.35 37.48,72.33 36.51,71.36 36.51,63.32 SLOT-2.B22
GP_2
  Bottom 0.152: SLOT-1.B23 37.17,74.66 37.17,72.52 36.2,71.55 36.2,60.63 SLOT-2.B23
GP_3
  Bottom 0.152: SLOT-1.B24 35.48,77.35 35.48,72.44 34.51,71.47 34.51,63.33 SLOT-2.B24
GP_4
  Bottom 0.152: SLOT-1.B25 35.17,74.66 35.17,72.56 34.2,71.59 34.2,60.63 SLOT-2.B25
GP_5
  Bottom 0.152: SLOT-1.B28 31.48,77.35 31.48,72.48 30.5,71.5 30.5,63.33 SLOT-2.B28
GP_6
  Bottom 0.152: SLOT-1.B29 31.17,74.66 31.17,72.61 30.2,71.64 30.2,60.63 SLOT-2.B29
GP_7
  Bottom 0.152: SLOT-1.B30 29.48,77.35 29.48,72.48 28.51,71.51 28.51,63.32 SLOT-2.B30
GP_8
  Bottom 0.152: SLOT-1.B31 28.34,75.41 29.17,74.58 29.17,72.61 28.2,71.64 28.2,60.63 SLOT-2.B31
GP_9
  Bottom 0.152: SLOT-1.B32 27.48,77.35 27.48,72.42 26.51,71.45 26.51,70.51 26.5,70.5 26.5,63.33 SLOT-2.B32
GP_10
  Top 0.152: SLOT-1.A28 31.34,70.84 30.5,70 30.5,61.93 31.48,60.96 31.48,56.15 SLOT-2.A28
GP_11
  Top 0.152: SLOT-1.A29 30.2,72.87 30.2,61.8 30.68,61.32 31.17,60.84 31.17,58.9 30.34,58.06 SLOT-2.A29
GP_12
  Top 0.152: SLOT-1.A30 29.34,70.84 28.5,70 28.5,61.94 29.48,60.96 29.48,56.15 SLOT-2.A30
GP_13
  Top 0.152: SLOT-1.A31 28.17,72.84 28.17,61.84 29.17,60.84 29.17,58.9 28.34,58.06 SLOT-2.A31
GP_14
  Top 0.152: SLOT-1.A32 27.34,70.84 26.5,70 26.5,61.99 27.5,60.99 27.5,56.17 SLOT-2.A32
GP_15
  Top 0.152: SLOT-1.A33 26.2,72.87 26.2,61.81 27.2,60.81 27.2,58.87 SLOT-2.A33
GP_16
  Top 0.152: SLOT-1.A34 24.51,70.18 24.51,61.95 25.5,60.95 25.5,56.17 SLOT-2.A34
GP_17  (via drill 0.4)
  Top 0.152: SLOT-1.A35 24.19,72.86 24.19,61.82 25.17,60.84 25.17,58.84 SLOT-2.A35 | X1.3 13.2,50.95 12.69,51.45 v12.69,51.96
  Bottom 0.152: v12.69,51.96 12.69,52.43 13.35,53.09 18.75,53.09 20.84,55.18 21.68,55.18 22.25,55.74 22.25,56.5 23.76,58.01 SLOT-2.A35
GP_18  (via drill 0.4)
  Top 0.152: SLOT-1.A36 22.51,70.18 22.51,61.98 23.48,61.01 23.48,56.15 SLOT-2.A36 | X1.4 14.45,51.15 14.17,51.42 v14.17,51.96
  Bottom 0.152: v14.17,51.96 14.17,52.53 14.43,52.79 18.88,52.79 20.97,54.87 21.81,54.87 22.95,56.01 SLOT-2.A36
INT_1
  Bottom 0.152: SLOT-1.B16 43.48,77.35 43.48,72.33 42.51,71.36 42.51,63.32 SLOT-2.B16
INT_1_(E)
  Top 0.152: SLOT-1.A22 36.49,70.17 36.49,61.99 37.48,61 37.48,56.15 SLOT-2.A22
INT_2
  Top 0.152: SLOT-1.A16 42.5,70.17 42.5,62 43.48,61.02 43.48,56.15 SLOT-2.A16
INT_2_(E)
  Top 0.152: SLOT-1.A23 36.19,72.86 36.19,61.86 37.17,60.88 37.17,58.84 SLOT-2.A23
INT_3
  Bottom 0.152: SLOT-1.B17 43.17,74.66 43.17,72.47 42.2,71.5 42.2,60.63 SLOT-2.B17
INT_3_(E)
  Top 0.152: SLOT-1.A24 34.51,70.18 34.51,61.93 35.48,60.96 35.48,56.15 SLOT-2.A24
INT_4
  Top 0.152: SLOT-1.A17 42.19,72.86 42.19,61.82 43.17,60.84 43.17,58.9 42.34,58.06 SLOT-2.A17
INT_4_(E)
  Top 0.152: SLOT-1.A25 34.19,72.86 34.19,61.81 34.68,61.32 34.69,61.32 35.17,60.84 35.17,58.84 SLOT-2.A25
INT_5
  Bottom 0.152: SLOT-1.B18 41.48,77.35 41.48,72.33 40.48,71.33 40.48,63.35 SLOT-2.B18
INT_5_(E)
  Top 0.152: SLOT-1.A26 32.5,70.17 32.5,61.94 33.48,60.96 33.48,56.15 SLOT-2.A26
INT_6
  Top 0.152: SLOT-1.A18 40.49,70.17 40.49,61.94 41.48,60.96 41.48,56.15 SLOT-2.A18
INT_6_(E)
  Top 0.152: SLOT-1.A27 32.19,72.86 32.19,61.82 33.17,60.84 33.17,58.9 32.34,58.06 SLOT-2.A27
INT_7
  Bottom 0.152: SLOT-1.B19 40.34,75.44 41.17,74.61 41.17,72.47 40.18,71.47 40.18,60.65 SLOT-2.B19
INT_8
  Top 0.152: SLOT-1.A19 40.19,72.86 40.19,61.82 41.17,60.84 41.17,58.84 SLOT-2.A19
INT_9
  Bottom 0.152: SLOT-1.B20 39.48,77.35 39.48,72.33 38.51,71.35 38.51,63.33 SLOT-2.B20
INT_10
  Top 0.152: SLOT-1.A20 38.5,70.17 38.5,61.94 39.48,60.96 39.48,56.15 SLOT-2.A20
INT_11
  Bottom 0.152: SLOT-1.B21 39.17,74.66 39.17,72.47 38.2,71.5 38.2,60.63 SLOT-2.B21
INT_12
  Top 0.152: SLOT-1.A21 38.17,72.84 38.17,61.84 39.17,60.84 39.17,58.9 38.34,58.06 SLOT-2.A21
INT_E_1  (via drill 0.4)
  Top 0.152: X5.2 55.16,52.05 v54.98,52.24
  Bottom 0.152: SLOT-1.B9 51.48,74.63 51.48,72.54 50.3,71.37 50.3,64.7 52.17,62.84 52.17,60.66 SLOT-2.B9 52.34,60.44 51.51,59.6 51.51,57.66 51.55,57.62 51.48,57.55 51.48,57.54 50.51,56.57 50.51,54.69 51.95,53.25 53.87,53.25 54.88,52.24 v54.98,52.24
INT_E_2  (via drill 0.4)
  Top 0.152: v53.75,52.24 53.91,52.08 X5.1
  Bottom 0.152: SLOT-1.B10 51.17,77.32 51.17,72.67 50,71.49 50,63.83 51.17,62.66 | 51.29,62.54 SLOT-2.B10 51.17,62.66 | v53.75,52.24 53.05,52.94 51.76,52.94 50.2,54.5 50.2,56.69 51.17,57.66 51.17,62.66
INT_E_3
  Bottom 0.152: SLOT-1.B36 23.48,77.35 23.48,72.39 22.51,71.42 22.51,63.32 SLOT-2.B36
INT_E_4
  Bottom 0.152: SLOT-1.B35 24.84,74.99 24.84,74.94 25.17,74.61 25.17,72.52 24.2,71.55 24.2,60.63 SLOT-2.B35
INT_E_5
  Bottom 0.152: SLOT-1.B34 25.48,77.35 25.48,72.33 24.51,71.36 24.51,63.32 SLOT-2.B34
INT_E_6
  Bottom 0.152: SLOT-1.B33 26.34,75.44 27.17,74.61 27.17,72.56 26.17,71.56 26.17,60.66 SLOT-2.B33
MISO_1
  Bottom 0.152: SLOT-1.B15 45.17,74.66 45.17,72.63 44.19,71.65 44.19,60.64 SLOT-2.B15
MISO_2
  Bottom 0.152: SLOT-1.B42 17.48,77.35 17.48,72.5 16.5,71.52 16.5,63.33 SLOT-2.B42
MOSI_1
  Top 0.152: SLOT-1.A14 45.34,70.84 44.5,70 44.5,61.94 45.48,60.96 45.48,56.15 SLOT-2.A14
MOSI_2
  Bottom 0.152: SLOT-1.B41 19.17,74.66 19.17,72.47 18.2,71.5 18.2,60.63 SLOT-2.B41
N$1
  Top 0.254: LED1.A R6.1
N$2
  Top 0.254: R11.1 LED2.A
N$3
  Top 0.406: 12V.C 64.05,14.85 R12.2
N$4
  Top 0.152: SJ6.2 23.75,18.78 23.75,12.25 24.5,11.5 31.5,11.5 32.55,12.55 32.55,13.45
  Top 0.254: INA2.8 32.8,13.71 32.55,13.45 R14.2
N$6
  Top 1.016: X15.2 57.02,7.73 52.25,12.5 52.25,17 49.97,19.28 D4.A
N$7
  Top 0.152: SJ5.2 25.27,15.98 26.93,14.31 26.93,13.5
  Top 0.254: INA2.7 31.39,14.36 30.75,15 27.75,15 26.93,14.19 26.93,13.5 R13.2
N$8
  Top 0.508: R7.1 42.64,40.32 45.46,40.32 46.98,38.8 U2.7
N$9
  Top 0.508: R8.2 C8.2
N$10
  Top 0.508: C7.1 52.69,40.19 46.99,40.19 45.49,41.69 41.59,41.69 40.64,40.74 40.64,29.64 | 41.64,28.64 43.24,28.64 44.14,29.54 44.14,35.98 U2.8
  Top 0.61: 41.64,28.64 40.64,29.64
N$11
  Top 0.508: C8.1 56.2,39.19 48.77,39.19 48.26,38.67 U2.6
N$12
  Top 0.152: 52.5,26.76 53.8,28.06 L2.1 53.8,26.81 53.09,26.09
  Top 0.508: 53.16,27.5 L2.1 | C10.1 42.54,23.59 43.14,23.59 46.31,26.76 D2.C | 52.5,26.76 D2.C | D2.C 48.09,29.69 48.26,29.86 U2.3
  Top 0.61: 53.09,26.09 53.72,26.73
N$13
  Top 0.152: U2.5 49.52,37.8
  Top 0.508: R10.2 R9.1 55.24,37.28 54.24,38.29 50.01,38.29 49.73,38.02 49.52,37.8
N$14
  Top 0.508: U2.1 45.72,28.57 42.79,25.64 C10.2
N$15
  Top 0.406: INA2.5 34.66,16.14 34.66,17.97 32.26,20.37 SJ7.2
N$16
  Top 0.406: 32.51,16.82 SJ8.2 33.43,16.82 33.75,16.5 33.75,15.5 34.24,15.01 INA2.6
N$20
  Top 0.254: 7.58,25.15 8.09,25.66 8.09,26.29 9.36,27.56 11.1,27.56 11.52,27.98 11.52,30.66 U$9.4
  Top 0.305: 4.02,26.93 5.8,25.15 7.58,25.15
  Top 0.406: R19.1 10.44,41.91 6.31,41.91 5.68,41.28 5.68,35.31 4.02,33.65 4.02,26.93
  Top 0.508: C14.1 R20.1 15.46,40.07 R19.1
N$21  (via drill 0.65)
  Top 0.406: U$9.8 13.92,36.06 v14.06,36.2 | D1.2 14.06,27.9 v14.06,31.1 | L3.2 33.2,30.43 32.88,30.75
  Top 0.61: v20.93,36.45 22.5,34.88 22.5,33.5 23.5,32.5 32.5,32.5 33.25,31.75 33.25,30.48 33.2,30.43
  Bottom 0.406: v20.93,36.45 14.31,36.45 v14.06,36.2 v14.06,31.1
N$22
  Top 0.406: U$9.6 11.72,33.71 11.07,34.36 U$9.2 7.21,34.36 6.6,33.75 | 9.62,28.51 R22.1 9.29,28.51 7.39,26.61 R21.2 5.74,26.61 4.79,27.56 4.79,32.77 5.77,33.75 6.6,33.75 | 6.6,33.75 C15.2
N$23
  Top 0.406: U$9.3 9.08,33.75 8.59,33.75 7.92,33.08 7.71,32.87 7.71,29.78 R21.1
N$37
  Top 0.406: R5.2 54.11,15.24 54.11,17.43 3V3.C
NRST  (1 unrouted)
OUT
  Top 0.406: 14.62,34.36 14.77,34.36 15.33,34.93 15.33,37.79 R20.2 C14.2 20.64,38.04 21.53,38.93 32.07,38.93 32.75,38.25 F5.2 | 14.62,34.36 U$9.7 12.34,34.36 10.12,36.58 10.12,38.99 8.72,40.39 C17.1 | R22.2 11.09,25.77 17.01,25.77 D1.1 15.33,31.03 15.33,33.66 14.62,34.36
OUT_3V3  (via drill 0.35, 0.65)
  Top 0.152: L2.2 62.89,29.05 62.89,29.64
  Top 0.254: 3V3.A 57.75,18.97 57.75,24 62.25,28.5 63.5,28.5
  Top 0.305: 63.5,28.5 63.5,28.43 L2.2 63.8,29.66 64.14,30
  Top 0.406: F3.2 29.79,41.52 28.81,42.5 v28,42.5 24.12,42.5 22.89,41.27 F1.2
  Top 0.508: C9.1 64.29,36.75 v62.54,35 64.14,33.4 64.14,30 64.14,29.49 | R9.2 53.34,35.78 54.89,34.24 60.89,34.24 62.89,32.24 62.89,29.64 62.75,29.5
  Bottom 0.406: v28,42.5 52.25,42.5 53.75,41 56.54,41 v62.54,35
PWM_1
  Top 0.152: SLOT-1.A40 19.34,70.59 18.5,69.75 18.5,62.03 19.5,61.03 19.5,56.17 SLOT-2.A40
PWM_2
  Top 0.152: SLOT-1.A43 16.19,72.86 16.19,61.81 16.68,61.32 17.2,60.81 17.2,58.87 SLOT-2.A43
RXLED  (via drill 0.35)
  Top 0.254: v3.5,13.75 3.5,12.8 LED2.C | U1.22 8.93,23.07 8,24 v4.75,24
  Bottom 0.254: v3.5,13.75 3.5,22.75 v4.75,24
SCL_1
  Bottom 0.152: SLOT-1.B27 33.17,74.66 33.17,72.52 32.17,71.52 32.17,60.66 SLOT-2.B27
SCL_2  (via drill 0.35, 0.4)
  Top 0.152: v11.42,51.96 11.42,51.45 12,50.87 12,50.27 X1.2 11.63,49.89 11.63,45.52 13.41,43.75 33.5,43.75 35.25,42 35.25,32.5 35.83,31.92 35.83,30.88 R1.1 | R1.1 37.15,29.8 | R1.1 37.15,28.15 v37,28 | v28.75,21.75 30.13,20.37 SJ7.1
  Bottom 0.152: SLOT-1.B37 22.51,75.49 23.17,74.83 23.17,72.52 22.2,71.54 22.2,60.63 SLOT-2.B37 21.5,59.65 21.5,57.36 20.5,56.37 20.5,55.27 18.63,53.4 12.43,53.4 11.42,52.39 v11.42,51.96 12.63,50.75 43.25,50.75 45.75,48.25 | v28.75,21.75 29.75,22.75 35.25,22.75 37,24.5 v37,28
SCLK_1
  Bottom 0.152: SLOT-1.B14 45.48,77.35 45.48,72.48 44.51,71.51 44.51,63.32 SLOT-2.B14
SCLK_2
  Bottom 0.152: SLOT-1.B40 19.48,77.35 19.48,72.33 18.5,71.35 18.5,63.33 SLOT-2.B40
SDA_1
  Bottom 0.152: SLOT-1.B26 33.48,77.35 33.48,72.33 32.51,71.36 32.51,71.26 32.5,71.25 32.5,63.33 SLOT-2.B26
SDA_2  (via drill 0.35, 0.4)
  Top 0.152: v10.17,51.96 10.17,51.33 10.75,50.75 10.75,50.27 X1.1 10.71,45.86 13.15,43.42 33.27,43.42 34.84,41.84 | 34.84,41.84 34.91,41.78 | 34.84,41.84 34.84,32.41 35.5,31.75 35.5,25.4 R2.1 36.9,23.15 v36,22.25 | SJ8.1 30.68,16.82 v29,18.5
  Bottom 0.152: SLOT-1.B38 21.48,77.35 21.48,72.33 20.51,71.36 20.51,63.32 SLOT-2.B38 21.19,62.34 21.19,57.49 20.19,56.48 20.19,55.44 18.45,53.7 11.58,53.7 10.17,52.29 v10.17,51.96 11.88,50.25 42.75,50.25 45,48 | v29,18.5 29,20.39 30.61,22 35.75,22 v36,22.25
SS_1
  Top 0.152: SLOT-1.A15 44.19,72.86 44.19,61.82 45.17,60.84 45.17,58.9 44.34,58.06 SLOT-2.A15
SS_2
  Bottom 0.152: SLOT-1.B39 21.17,74.66 21.17,72.47 20.2,71.49 20.2,60.63 SLOT-2.B39
SWCLK  (1 unrouted)
SWDIO  (1 unrouted)
SWO  (1 unrouted)
TXLED  (via drill 0.35)
  Top 0.152: U1.23 8.28,22.98 8,23.25 4.92,23.25 4.32,22.65 v4.32,22.5 | LED1.C 6.7,12.3 v5.5,13.5
  Bottom 0.152: v4.32,22.5 4.32,14.68 v5.5,13.5
USB_D+
  Top 0.152: 15.39,19.64 15.39,12.6 15.79,12.21 X3.D+
  Top 0.203: U1.15 13.5,22.13 13.5,21 13.75,20.75 14.29,20.75 15.39,19.64
USB_D-
  Top 0.152: 15,19.45 15,11.75 | 15,11.75 15,11.5 | X3.D- 14.99,11.74 15,11.75
  Top 0.203: 15,19.45 14.2,20.25 13.5,20.25 12.84,20.91 12.84,22.14 U1.16

## Text on the board
tNames: Genus Main Board Lite v.1.0 | Main Slot | I2C Bus | CAN Bus | General Bus | Power In